# EAGLE board linkmp6 (EAGLE 5.05)
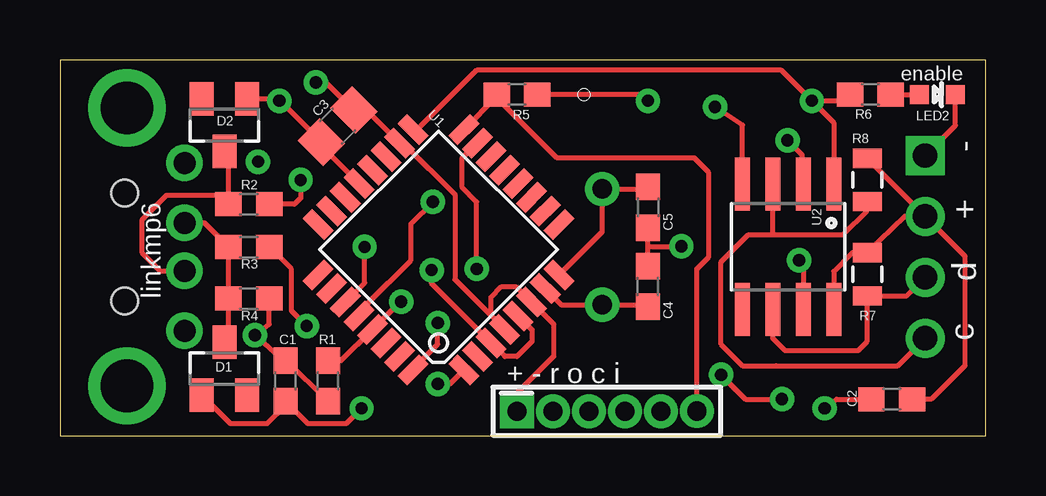
[diagram p0: board, top side]
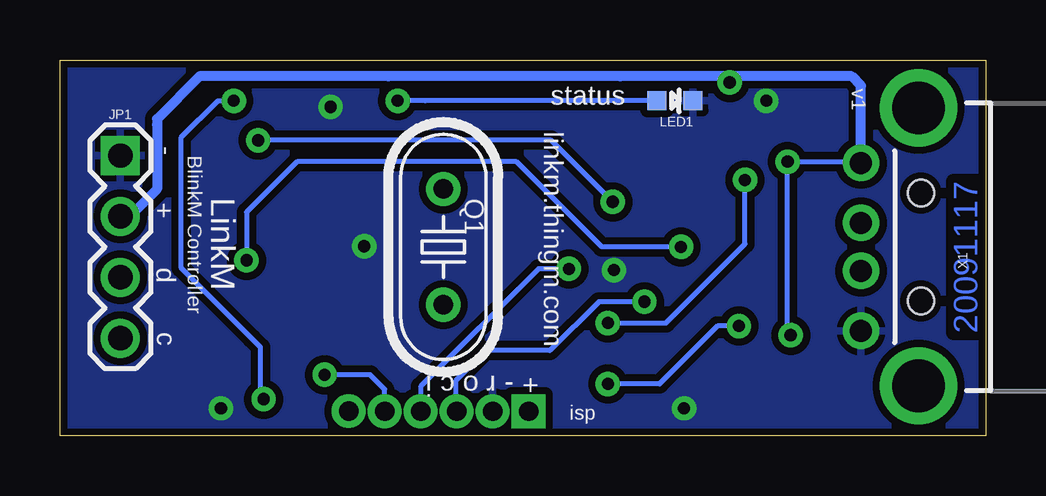
[diagram p1: board, bottom side, seen from below]

Size 38.59 x 15.67 mm. Coordinates in mm from the lower left corner, seen from the top.
Outline: 0,0 38.59,0 38.59,15.67 0,15.67 0,0
Copper layers (1*16): Top 0.035mm / dielectric 1.5mm / Bottom 0.035mm
Design rules "SparkFun": minimum track width 8mil, minimum drill 20mil, track to track 8mil, track to pad 8mil, pad to pad 8mil, via to via 8mil, smd to smd 8mil, copper to edge 10mil, drill to drill 8mil, minimum pad ring 12mil, minimum via ring 10mil, stop-mask expansion 4mil, vias tented up to drill 25mil, thermal gap 10mil

## Footprints (pad centres in the part's own frame; a part is rotated, then mirrored left to right if it is on the bottom)
C0603 = smd 1.1 x 1: 1 -0.85,0; 2 0.85,0
C0805 = smd 1.3 x 1.5: 1 -0.95,0; 2 0.95,0
0603 = smd 1.1 x 1: 1 -0.85,0; 2 0.85,0
SOT23 = smd 1 x 1.4: 1 -0.95,-1.1; 2 0.95,-1.1; 3 0,1.1
AVR_MINI_PROG = drill 0.8 pad 1.27 square: 1 0,0 | drill 0.8 pad 1.27 round: 2 1.5,0; 3 3,0; 4 4.5,0; 5 6,0; 6 7.5,0.01
1X04 = drill 1.016 square: 1 0,0 | drill 1.016 round: 2 2.54,0; 3 5.08,0; 4 7.62,0
LED-0603 = smd 0.8 x 0.8: A 0,-0.75; C 0,0.75
HC49U-V = drill 0.813 round: 1 -2.413,0; 2 2.413,0
0805 = smd 0.8 x 1.2: 1 -0.9,0; 2 0.9,0
TQFP32-08 = smd 1.27 x 0.559: 1 -4.293,2.8; 2 -4.293,2; 3 -4.293,1.2; 4 -4.293,0.4; 5 -4.293,-0.4; 6 -4.293,-1.2; 7 -4.293,-2; 8 -4.293,-2.8; 17 4.293,-2.8; 18 4.293,-2; 19 4.293,-1.2; 20 4.293,-0.4; 21 4.293,0.4; 22 4.293,1.2; 23 4.293,2; 24 4.293,2.8 | smd 0.559 x 1.27: 9 -2.8,-4.293; 10 -2,-4.293; 11 -1.2,-4.293; 12 -0.4,-4.293; 13 0.4,-4.293; 14 1.2,-4.293; 15 2,-4.293; 16 2.8,-4.293; 25 2.8,4.293; 26 2,4.293; 27 1.2,4.293; 28 0.4,4.293; 29 -0.4,4.293; 30 -1.2,4.293; 31 -2,4.293; 32 -2.8,4.293
SO08 = smd 0.61 x 2.21: 1 -1.905,-2.616; 2 -0.635,-2.616; 3 0.635,-2.616; 4 1.905,-2.616; 5 1.905,2.616; 6 0.635,2.616; 7 -0.635,2.616; 8 -1.905,2.616
USB-A-H = drill 0.914 round: D+ 2.4,1; D- 2.4,-1; GND 2.4,3.5; VBUS 2.4,-3.5 | drill 2.2 round: GND@1 0,5.8; GND@2 0,-5.8 | hole 1.1: -0.1,2.25; -0.1,-2.25

## Placement (x,y rotation side)
C1  0.1uF  [C0603]  9.4,2.29 270 top
C2  0.1uF  [C0603]  34.67,1.52 180 top
C3  10uF  [C0805]  11.57,12.92 225 top
C4  18pF  [0603]  24.51,6.22 90 top
C5  18pF  [0603]  24.51,9.53 270 top
D1  3.6v  [SOT23]  6.86,2.79 0 top
D2  3.6v  [SOT23]  6.86,12.95 180 top
ISP1  AVR_MINI_PROGSMD  [AVR_MINI_PROG]  19.05,1.02 0 top
JP1  blinkm  [1X04]  36.07,11.68 270 bottom
LED1  status  [LED-0603]  12.95,13.97 270 bottom
LED2  enable  [LED-0603]  36.58,14.22 270 top
Q1  16MHz  [HC49U-V]  22.61,7.87 90 bottom
R1  10k  [0603]  11.18,2.29 90 top
R2  68  [0603]  7.87,9.65 180 top
R3  68  [0603]  7.87,7.87 180 top
R4  1.5k  [0603]  7.87,5.71 180 top
R5  1k  [0603]  19.05,14.22 0 top
R6  1k  [0603]  33.78,14.22 0 top
R7  4.7k  [0805]  33.66,6.73 270 top
R8  4.7k  [0805]  33.66,10.67 270 top
U1  MEGA8-AI  [TQFP32-08]  15.78,7.76 135 top
U2  PCA9513A  [SO08]  30.35,7.87 180 top
X1  USB-A-H  [USB-A-H]  2.79,7.87 180 bottom

## Library data of the parts
C1-C3 = rcl
C4 C5 ISP1 JP1 LED1 LED2 Q1 R1-R8 X1 = SparkFun-20090330
D1 D2 = diode
U1 = atmel
U2 = todstuff

## Nets
D+: D2.3 R2.2 X1.D+
D-: D1.3 R3.2 R4.2 X1.D-
GND: C1.2 C2.2 C3.2 C4.2 C5.2 D1.1 D2.1 ISP1.2 JP1.1 LED1.C LED2.C U1.3 U1.5 U1.21 U2.4 X1.GND
MISO: ISP1.6 R5.1 U1.16
MOSI: ISP1.4 U1.15
N$1: LED2.A R6.2
N$2: R2.1 U1.32
N$3: U1.30
N$4: U1.31
N$6: C4.1 Q1.1 U1.7
N$7: C5.1 Q1.2 U1.8
N$8: LED1.A R5.2
N$9: R3.1 U1.1
RESET: ISP1.3 R1.2 U1.29
SCK/ENABLE: ISP1.5 R6.1 U1.17 U2.1
SCL: U1.28 U2.2
SCLBUS: JP1.4 R8.2 U2.3
SDA: U1.27 U2.7
SDABUS: JP1.3 R7.2 U2.6
VCC: C1.1 C2.1 C3.1 ISP1.1 JP1.2 R1.1 R4.1 R7.1 R8.1 U1.4 U1.6 U1.18 U2.8 X1.VBUS

## Tracks (layer width: path | path; a pad name or v marks a point on that pad's centre or on a via)
D+
  Top 0.203: D2.3 7.02,11.69 R2.2 6.64,10.03 4.45,10.03 3.43,9.02 3.43,7.62 4.17,6.87 X1.D+
D-
  Top 0.203: X1.D- 6.02,8.87 R3.2 R4.2 7.02,4.06 D1.3
GND  (via drill 0.51)
  Top 0.203: D2.1 8.81,14.05 v9.14,13.97 9.18,13.97 C3.2 10.9,12.07 U1.21 | 9.4,1.27 C1.2 | U1.3 | D1.1 7.09,0.51 8.64,0.51 9.4,1.27 | 9.4,1.27 C1.2 | C1.2 10.33,0.51 11.94,0.51 v12.57,1.14 | U1.3 17.98,3.66 | U1.3 15.49,6.34 v15.49,6.91 | U1.5 19.68,4.42 19.68,3.94 19.05,3.3 18.54,3.3 U1.3 | U1.3 | LED2.C 37.33,12.94 JP1.1 | C2.2 32.38,1.52 v31.88,1.14 | v27.3,13.72 28.45,12.95 U2.4 | 24.51,7.9 C4.2 24.51,7.9 | 24.51,7.9 C5.2 | 24.51,7.9 v25.91,7.9
  pour Bottom (isolate 0.305): 0,18.03 0,-2.29 39.88,-2.29 39.88,18.03
MISO
  Top 0.203: U1.16 18.2,14.14 R5.1 18.29,14.02 20.73,11.58 26.44,11.58 27.05,10.97 27.05,7.46 26.55,6.96 ISP1.6
  Bottom 0.203: ISP1.6 26.69,0.89
MOSI  (via drill 0.51)
  Top 0.203: v17.37,6.96 17.37,9.75 16.76,10.36 16.76,11.58 17.37,12.19 U1.15
  Bottom 0.203: v17.37,6.96 18.64,6.96 23.55,2.05 ISP1.4
N$1
  Top 0.203: LED2.A 35.56,14.22 34.54,14.22 R6.2
N$2  (via drill 0.51)
  Top 0.203: U1.32 14.72,2.79 15.75,3.81 v15.75,4.7 | R2.1 9.78,9.65 9.91,9.78 10.03,9.91 v10.03,10.67
  Bottom 0.203: v15.75,4.7 13.34,4.7 10.03,8 v10.03,10.67
N$6
  Top 0.203: U1.7 20.9,5.46 Q1.1 24.42,5.46 arc-90 C4.1
N$7
  Top 0.203: U1.8 22.61,8.51 Q1.2 24.42,10.29 arc90 C5.1
N$8  (via drill 0.51)
  Top 0.203: R5.2 24.13,14.22 v24.51,13.97
  Bottom 0.203: LED1.A 23.37,13.97 24.13,13.97 v24.51,13.97
N$9  (via drill 0.51)
  Top 0.203: 16.58,2.86 U1.1 16.25,2.16 v15.75,2.16 | R3.1 9.65,6.95 9.65,5.71 9.65,5.21 v10.29,4.57
  Bottom 0.203: v10.29,4.57 11.18,4.57 13.59,2.16 v15.75,2.16
RESET  (via drill 0.51)
  Top 0.203: R1.2 11.72,3.14 U1.29 14.18,5.59 v14.22,5.59
  Bottom 0.203: v14.22,5.59 16.13,5.59 18.16,3.56 20.83,3.56 22.1,2.29 22.1,1.06 ISP1.3
SCK/ENABLE  (via drill 0.51)
  Top 0.203: R6.1 32.98,14.22 32.73,13.97 v31.34,13.97 | U1.17 14.94,12.8 17.37,15.24 30.07,15.24 v31.34,13.97 | U2.1 32.26,13.06 v31.34,13.97 | v27.56,2.54 28.57,1.52 v30.1,1.52
  Bottom 0.203: v31.34,13.97 32,13.97 33.53,12.45 33.53,6.99 30.61,4.06 30.23,3.68 30.23,1.52 arc-90 v30.1,1.52 | v27.56,2.54 25.65,2.54 25.05,1.94 ISP1.5
SCL  (via drill 0.51)
  Top 0.203: v15.54,9.75 14.63,8.84 14.63,7.32 12.8,5.49 U1.28 | U2.2 30.93,11.71 v30.33,12.32
  Bottom 0.203: v15.54,9.75 18.11,12.32 30.61,12.32 v30.33,12.32
SCLBUS
  Top 0.203: 33.31,9.65 R8.2 33.66,9.4 32.64,8.38 30.48,8.38 29.72,8.38 | JP1.4 34.92,2.92 29.84,2.92 28.45,2.92 27.56,3.81 27.56,7.24 28.7,8.38 29.72,8.38 | 29.72,8.38 U2.3
SDA  (via drill 0.51)
  Top 0.203: U1.27 12.7,6.37 v12.7,7.87 | U2.7 30.99,7.32 v30.81,7.32
  Bottom 0.203: v12.7,7.87 16,7.87 19.56,11.43 28.7,11.43 30.81,9.32 v30.81,7.32
SDABUS
  Top 0.203: JP1.3 35.34,5.88 35.3,5.83 R7.2 33.66,3.94 33.27,3.56 30.23,3.56 29.72,4.06 U2.6
VCC  (via drill 0.51)
  Top 0.203: R1.1 C1.1 9.31,3.14 v8.13,4.19 8.72,4.66 R4.1 | ISP1.1 19.05,1.78 20.57,3.3 20.57,4.66 U1.6 19.01,6.22 18.41,6.22 17.96,5.77 17.96,5.01 | 17.96,5.01 16.46,6.51 16.46,10.06 14.33,12.19 U1.18 12.78,13.59 C3.1 11.1,14.73 v10.67,14.73 | 17.96,5.01 U1.4 | U1.4 | 17.96,5.01 U1.4 | R8.1 33.69,11.52 JP1.2 | C2.1 36.32,1.52 37.72,2.92 37.72,7.49 JP1.2 | JP1.2 35.22,9.14 R7.1 33.62,7.62 33.02,7.62 32.26,6.86 U2.8
  Bottom 0.203: 10.87,14.99 v10.67,14.73 | 8.38,4.29 v8.13,4.19 8.26,4.32 v8.26,11.43 5.19,11.43 5.19,11.18
  Bottom 0.406: X1.VBUS 5.19,11.18 X1.VBUS | X1.VBUS 5.19,11.43 5.19,14.59 5.59,14.99 10.87,14.99 15.24,14.99 24.89,14.99 32.77,14.99 34.54,13.21 34.54,12.95 34.54,10.29 35.69,9.14 JP1.2

## Text on the board
Bottom: 20091117
tPlace: - | + | d | linkmp6 | c | + - r o c i
bPlace: v1 | linkm.thingm.com | BlinkM Controller | - | LinkM | + | d | c | + - r o c i | isp